# Altium PCB TFD-50RA.PcbDoc
Units mm, origin at the board's own origin, x right, y up, seen from the top; angles counter-clockwise.
Board outline 100 x 54 mm, 2 copper layers (Top Layer, Bottom Layer); 7 components, 5 nets, 21 pads, 0 vias.
Unrouted connection lines stored in the file: 1.
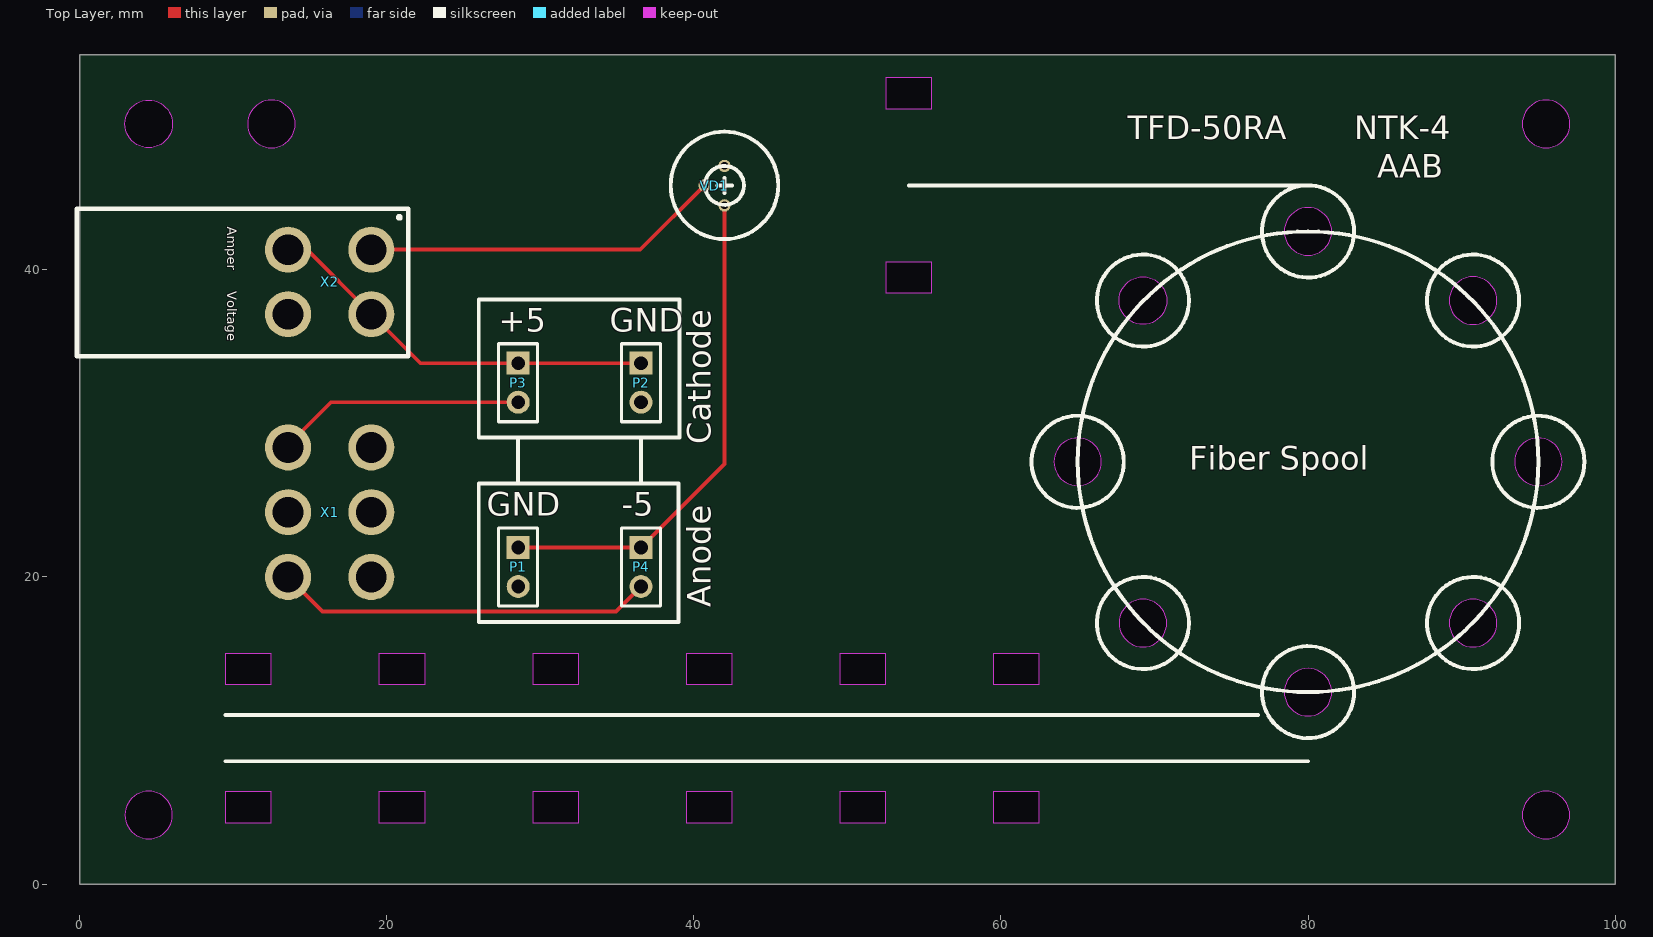
[diagram p0: Top Layer view]
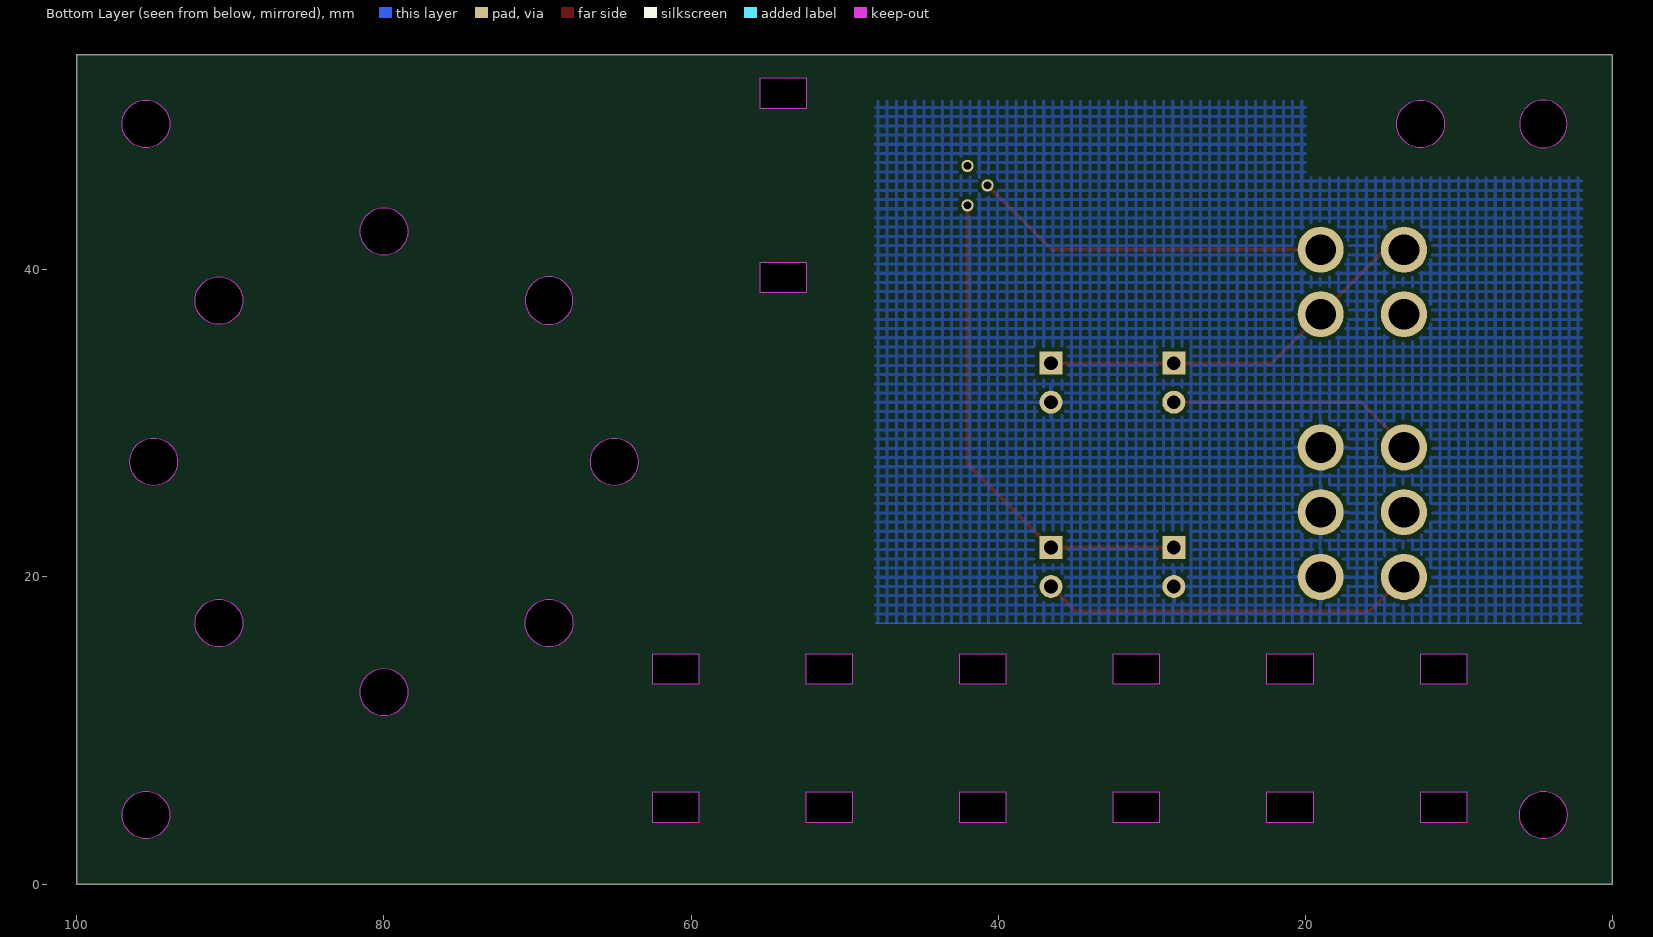
[diagram p1: Bottom Layer view, seen from below]

## Layer stack, top to bottom
Top Solder: solder mask 0.0102, Solder Resist, Dk 3.5
Top Layer: signal copper 0.0356
Dielectric 1: dielectric 0.32, FR-4, Dk 4.8
Bottom Layer: signal copper 0.0356
Bottom Solder: solder mask 0.0102, Solder Resist, Dk 3.5

## Board outline
0,0 100,0 100,54 0,54
cut-out: 9.5,13 12.5,13 12.5,15 9.5,15
cut-out: 9.5,4 12.5,4 12.5,6 9.5,6
cut-out: 19.5,4 22.5,4 22.5,6 19.5,6
cut-out: 19.5,13 22.5,13 22.5,15 19.5,15
cut-out: 29.5,13 32.5,13 32.5,15 29.5,15
cut-out: 29.5,4 32.5,4 32.5,6 29.5,6
cut-out: 39.5,13 42.5,13 42.5,15 39.5,15
cut-out: 39.5,4 42.5,4 42.5,6 39.5,6
cut-out: 49.5,4 52.5,4 52.5,6 49.5,6
cut-out: 59.5,4 62.5,4 62.5,6 59.5,6
cut-out: 59.5,13 62.5,13 62.5,15 59.5,15
cut-out: 93.952,4.5 ccw(c95.5,4.5) 95.5,2.952 ccw(c95.5,4.5) 97.048,4.5 ccw(c95.5,4.5) 95.5,6.048 ccw(c95.5,4.5)
cut-out: 2.95,4.5 ccw(c4.5,4.5) 4.5,2.95 ccw(c4.5,4.5) 6.05,4.5 ccw(c4.5,4.5) 4.5,6.05 ccw(c4.5,4.5)
cut-out: 63.45,27.5 ccw(c65,27.5) 65,25.95 ccw(c65,27.5) 66.55,27.5 ccw(c65,27.5) 65,29.05 ccw(c65,27.5)
cut-out: 67.7,17 ccw(c69.25,17) 69.25,15.45 ccw(c69.25,17) 70.8,17 ccw(c69.25,17) 69.25,18.55 ccw(c69.25,17)
cut-out: 78.45,12.5 ccw(c80,12.5) 80,10.95 ccw(c80,12.5) 81.55,12.5 ccw(c80,12.5) 80,14.05 ccw(c80,12.5)
cut-out: 89.2,17 ccw(c90.75,17) 90.75,15.45 ccw(c90.75,17) 92.3,17 ccw(c90.75,17) 90.75,18.55 ccw(c90.75,17)
cut-out: 93.45,27.5 ccw(c95,27.5) 95,25.95 ccw(c95,27.5) 96.55,27.5 ccw(c95,27.5) 95,29.05 ccw(c95,27.5)
cut-out: 93.95,49.5 ccw(c95.5,49.5) 95.5,47.95 ccw(c95.5,49.5) 97.05,49.5 ccw(c95.5,49.5) 95.5,51.05 ccw(c95.5,49.5)
cut-out: 89.2,38 ccw(c90.75,38) 90.75,36.45 ccw(c90.75,38) 92.3,38 ccw(c90.75,38) 90.75,39.55 ccw(c90.75,38)
cut-out: 78.45,42.5 ccw(c80,42.5) 80,40.95 ccw(c80,42.5) 81.55,42.5 ccw(c80,42.5) 80,44.05 ccw(c80,42.5)
cut-out: 67.7,38 cw(c69.25,38) 69.25,39.55 cw(c69.25,38) 70.8,38 cw(c69.25,38) 69.25,36.45 cw(c69.25,38)
cut-out: 67.7,38 cw(c69.25,38) 69.25,39.55 cw(c69.25,38) 70.8,38 cw(c69.25,38) 69.25,36.45 cw(c69.25,38)
cut-out: 10.95,49.5 ccw(c12.5,49.5) 12.5,47.95 ccw(c12.5,49.5) 14.05,49.5 ccw(c12.5,49.5) 12.5,51.05 ccw(c12.5,49.5)
cut-out: 4.5,47.95 cw(c4.5,49.5) 2.95,49.5 cw(c4.5,49.5) 4.5,51.05 cw(c4.5,49.5) 6.05,49.5 cw(c4.5,49.5)
cut-out: 49.5,13 52.5,13 52.5,15 49.5,15
cut-out: 52.5,38.5 55.5,38.5 55.5,40.5 52.5,40.5
cut-out: 52.5,50.5 55.5,50.5 55.5,52.5 52.5,52.5

## Design rules (kind name [scope] priority, off if disabled: settings)
Clearance [All] p1: gap=0.254 ignorepadtopadclearanceinfootprint=FALSE except(0: Arc-Hole Track-Hole SMDPad-Hole THPad-Hole Via-Hole Fill-Hole Poly-Hole Region-Hole Text-Hole)
PolygonConnect [All] p1: connectstyle=Relief reliefconductorwidth=0.254 reliefentries=4 polygonreliefangle="90 Angle" airgapwidth=0.254
RoutingVias [All] p1: holewidth=0.711 width=1.27 viastyle="Through Hole" minholewidth=0.711 minwidth=1.27 maxholewidth=0.711 maxwidth=1.27
SolderMaskExpansion [All] p1: expansion=0.102
Width [All] p1: maxlimit=0.254 minlimit=0.254 preferedwidth=0.254
30 further rules are at their usual default settings.

## Components (designator, comment, footprint, x,y, rotation, side; value= is the part's Value field where it differs from the comment)
P1 "Header 2" HDR1X2 28.565,21.92 r270 top
P2 "Header 2" HDR1X2 36.565,33.92 r270 top
P3 "Header 2" HDR1X2 28.565,33.92 r270 top
P4 "Header 2" HDR1X2 36.565,21.92 r270 top
VD1 "ТДФ-50РА" ТДФ-50РА 42,45.5 r90 top
X1 "POWER" POWER 19,20 r90 top
X2 "AMPVOLT" AMP_VOLTMETER 19,41.315 r270 top

## Footprints (in the part's own frame and the unit in brackets; to place one, negate y for a bottom-side part, rotate by r counter-clockwise, add the part's x,y. Pads: shape width x height; smd on the part's side, far side on the other; paste and mask are expansions set on the pad)
AMP_VOLTMETER [mm] "AMP_VOLTMETER"
  round 3 hole 2: 1(0,0) 2(0,-5.423) 3(4.2,-5.423) 4(4.2,0)
  silkscreen extent -2.66,-19.17 6.94,2.42
HDR1X2 [mm] "Connector; Header; 2 Position"
  rect 1.5x1.5 hole 0.9: 1(0,0)
  round 1.5 hole 0.9: 2(2.54,0)
  silkscreen extent -1.27,-1.27 3.81,1.27
POWER [mm] "POWER"
  round 3 hole 2: 1(8.435,5.422) 2(4.217,5.422) 3(0,5.422) 4(8.435,0) 5(4.217,0) 6(0,0)
ТДФ-50РА [mm]
  round 0.8 hole 0.5: 1(-1.3,0) 2(0,1.3) 3(1.27,0)
  silkscreen extent -3.5,-3.5 3.5,3.5

## Part data
P1 P2 P3 P4: "Header, 2-Pin", LatestRevisionDate=17-Jul-2002, LatestRevisionNote="Re-released for DXP Platform.", Publisher="Altium Limited"
X2: library part AMP_VOLTMETER

## Nets (pads, with @x,y where several pads share a name; then routed paths per layer and width w, separated by ;. In a path a pad name is that pad's centre, name@x,y a point inside that pad or via, vN(x,y) a via of type N, cw(c..) or ccw(c..) an arc to the next point about the centre after c; other vN are vias at no path point)
+5: P3.2 X1.1 | length 16.3
  Top Layer w0.254: X1.1 13.578,28.58 16.378,31.38 P3.2
-5: P4.2 X1.3 | length 24.6
  Top Layer w0.254: X1.3 15.827,17.75 34.935,17.75 P4.2
Anode: P1.1 P4.1 VD1.1 | length 32.5
  Top Layer w0.254: P1.1 P4.1 42,27.355 VD1.1
Cathode: P2.1 P3.1 VD1.2 X2.1 X2.2 X2.4 | length 49.5
  Top Layer w0.254: X2.2 14.8,41.315 X2.4 22.195,33.92 P3.1 P2.1 ; X2.1 36.515,41.315 VD1.2
GND: P1.2 P2.2 X1.4 X1.5 X1.6
pads on no net: VD1.3 X1.2 X2.3

## Polygon pours and split planes (outlines as drawn)
GND on Bottom Layer "GND_L02_P084" (hatched 90Degree grid 0.6 track 0.2, remove dead copper, pour order 84): 2,17 48,17 48,51 20,51 20,46 2,46
GND on Bottom Layer "GND_L02_P082" (hatched 90Degree grid 0.6 track 0.2, remove dead copper, pour order 82): 21,17
GND on Bottom Layer "GND_L02_P074" (hatched 90Degree grid 0.6 track 0.2, remove dead copper, pour order 74): 2,17
GND on Bottom Layer "GND_L02_P072" (hatched 90Degree grid 0.6 track 0.2, remove dead copper, pour order 72): 2,17 47,17
GND on Bottom Layer "GND_L02_P070" (hatched 90Degree grid 0.6 track 0.2, remove dead copper, pour order 70): 2,17 48,17
GND on Bottom Layer "GND_L02_P006" (hatched Horizontal grid 0.6 track 0.2, remove dead copper, pour order 6): 2,16.5
no net on Bottom Layer "NONET_L02_P002" (hatched 90Degree grid 0.6 track 0.2, pour order 2): 2.5,16
no net on Bottom Layer "NONET_L02_P000" (hatched 90Degree grid 0.6 track 0.2, pour order 0): 2.5,16

## Silkscreen, mask and mechanical layers (free items; w line width, h text height)
Top Overlay:
  circle w0.254: c95,27.5 r3
  circle w0.254: c90.75,38 r3
  circle w0.254: c80,42.5 r3
  circle w0.254: c69.25,38 r3
  circle w0.254: c65,27.5 r3
  circle w0.254: c90.75,17 r3
  circle w0.254: c80,12.5 r3
  circle w0.254: c69.25,17 r3
  circle w0.254: c80,27.5 r15
  lines w0.254: 9.5,8 80,8 ; 9.5,11 76.75,11 ; 26,26.08 26,17.08 39,17.08 39,26.08 26,26.08 ; 28.565,26.145 28.565,29.08 ; 36.565,26.145 36.565,29.08 ; 39,29.08 26,29.08 26,38.08 39,38.08 ; 39.065,29.08 39.065,38.08 ; 54,45.5 80,45.5
  text "TFD-50RA" at 68.25,48.5 h1.52
  text "NTK-4" at 83,48.5 h1.52
  text "AAB" at 84.5,46 h1.52
  text "+5" at 27.295,35.98 h1.52
  text "GND" at 34.534,35.98 h1.52
  text "Cathode" at 41.115,28.628 h1.52 r90
  text "Fiber Spool" at 72.256,26.992 h1.52
  text "GND" at 26.534,23.98 h1.52
  text "-5" at 35.295,23.98 h1.52
  text "Anode" at 41.115,18.025 h1.52 r90
Mechanical 1:
  circle w0.254: c95.5,4.5 r1.548
  circle w0.254: c4.5,4.5 r1.55
  circle w0.254: c69.25,17 r1.55
  circle w0.254: c80,12.5 r1.55
  circle w0.254: c90.75,17 r1.55
  circle w0.254: c95,27.5 r1.55
  circle w0.254: c90.75,38 r1.55
  circle w0.254: c80,42.5 r1.55
  circle w0.254: c69.25,38 r1.55
  circle w0.254: c65,27.5 r1.55
  circle w0.254: c95.5,49.5 r1.55
  circle w0.254: c12.5,49.5 r1.55
  circle w0.254: c4.5,49.5 r1.55
  lines w0.254: 0,0 0,54 100,54 100,0 0,0 ; 9.5,4 12.5,4 12.5,6 9.5,6 9.5,4 ; 9.5,13 12.5,13 12.5,15 9.5,15 9.5,13 ; 19.5,4 22.5,4 22.5,6 19.5,6 19.5,4 ; 19.5,13 22.5,13 22.5,15 19.5,15 19.5,13 ; 29.5,4 32.5,4 32.5,6 29.5,6 29.5,4 ; 29.5,13 32.5,13 32.5,15 29.5,15 29.5,13 ; 39.5,4 42.5,4 42.5,6 39.5,6 39.5,4 ; 39.5,13 42.5,13 42.5,15 39.5,15 39.5,13 ; 49.5,4 52.5,4 52.5,6 49.5,6 49.5,4 ; 49.5,13 52.5,13 52.5,15 49.5,15 49.5,13 ; 52.5,38.5 52.5,40.5 55.5,40.5 55.5,38.5 52.5,38.5 ; 52.5,50.5 52.5,52.5 55.5,52.5 55.5,50.5 52.5,50.5 ; 59.5,4 62.5,4 62.5,6 59.5,6 59.5,4 ; 59.5,13 59.5,15 62.5,15 62.5,13 59.5,13

## Text inside footprints (layer, text, board x,y; h text height)
X2: Top Overlay "Voltage" at 9.623,38.619 h0.63 r270; Top Overlay "Amper" at 9.623,42.819 h0.63 r270